# EAGLE board LoveMeter (EAGLE 7.5.0)
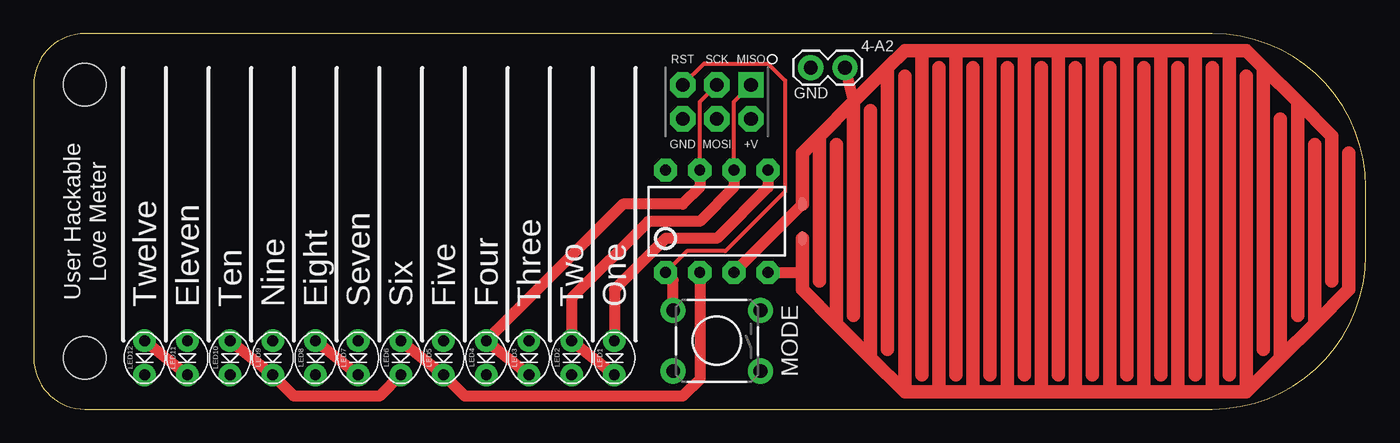
[diagram p0: board, top side]
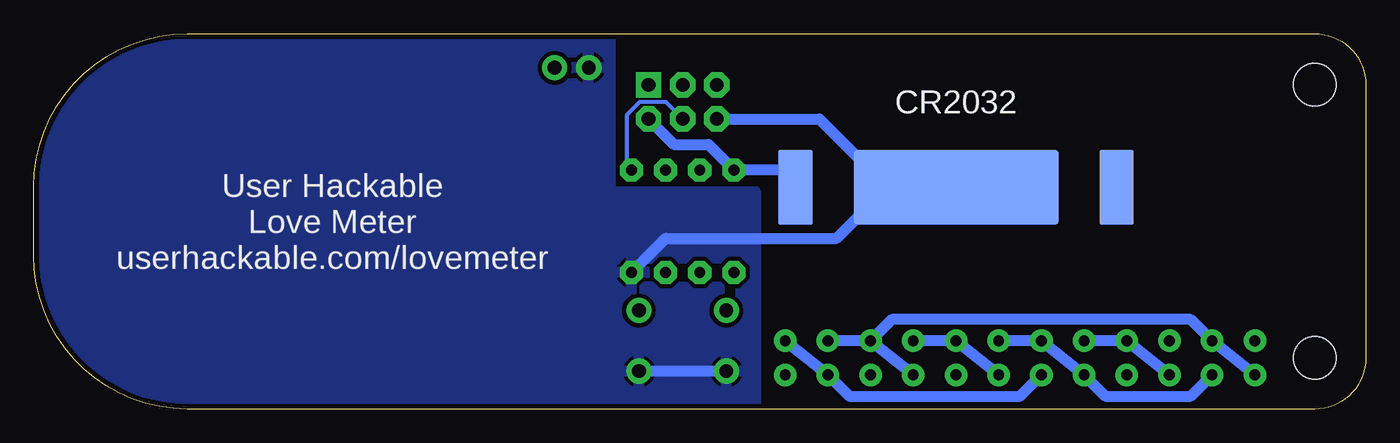
[diagram p1: board, bottom side, seen from below]

Size 99.06 x 27.94 mm. Coordinates in mm from the lower left corner, seen from the top.
Outline: 0,24.13 0,3.81 arc90 3.81,0 87.63,0 arc90 99.06,11.43 99.06,16.51 arc90 87.63,27.94 3.81,27.94 arc90 0,24.13
Copper layers (1*16): Top 0.0356mm / dielectric 1.5011mm / Bottom 0.0356mm
Design rules "LaenPCBOrder": minimum track width 6mil, minimum drill 13mil, track to track 6mil, track to pad 6mil, pad to pad 6mil, via to via 6mil, smd to smd 6mil, copper to edge 15mil, drill to drill 6mil, minimum pad ring 7mil, minimum via ring 7mil, stop-mask expansion 3mil, vias tented up to drill 0mil, thermal gap 10mil
Holes 3.17 mm at 3.81,3.81 3.81,24.13

## Footprints (pad centres in the part's own frame; a part is rotated, then mirrored left to right if it is on the bottom)
1X02 = drill 1.016 pad 1.88: 1 0,0; 2 2.54,0
2X3-NS = drill 1.016 pad 1.88 square: 1 -2.54,-1.27 | drill 1.016 pad 1.88 octagon: 2 -2.54,1.27; 3 0,-1.27; 4 0,1.27; 5 2.54,-1.27; 6 2.54,1.27
LED-OVAL = drill 0.8 pad 1.676: ANODE 1.27,0; CATHODE -1.27,0
TACTILE-PTH = drill 1.016 pad 1.88: 1 -3.251,2.261; 2 3.251,2.261; 3 -3.251,-2.261; 4 3.251,-2.261
DIP08 = drill 0.813 pad 1.727 octagon: 1 -3.81,-3.81; 2 -1.27,-3.81; 3 1.27,-3.81; 4 3.81,-3.81; 5 3.81,3.81; 6 1.27,3.81; 7 -1.27,3.81; 8 -3.81,3.81
THUMB_PAD = smd 1.016 x 0.508: 1 -1.27,20.32; 2 1.27,20.32
CR2032_STRAP = smd 2.54 x 5.588: + 11.938,0; +2 -11.938,0 | smd 15.24 x 5.588: - 0,0

## Placement (x,y rotation side)
4-A2  [1X02]  57.78,25.4 0 top
J1  AVR_SPI  [2X3-NS]  50.8,22.86 180 top
LED1  [LED-OVAL]  43.18,3.81 90 top
LED2  [LED-OVAL]  40.01,3.81 90 top
LED3  [LED-OVAL]  36.83,3.81 90 top
LED4  [LED-OVAL]  33.66,3.81 90 top
LED5  [LED-OVAL]  30.48,3.81 90 top
LED6  [LED-OVAL]  27.3,3.81 90 top
LED7  [LED-OVAL]  24.13,3.81 90 top
LED8  [LED-OVAL]  20.95,3.81 90 top
LED9  [LED-OVAL]  17.78,3.81 90 top
LED10  [LED-OVAL]  14.61,3.81 90 top
LED11  [LED-OVAL]  11.43,3.81 90 top
LED12  [LED-OVAL]  8.26,3.81 90 top
MODE  [TACTILE-PTH]  50.8,5.08 180 top
U1  TINY85  [DIP08]  50.8,13.97 0 top
U$3  THUMB_PAD  [THUMB_PAD]  77.47,13.97 90 top
U$4  [CR2032_STRAP]  30.48,16.51 0 bottom

## Library data of the parts
4-A2 = SparkFun-Connectors
J1 LED1-LED12 MODE = barbary_enterprises
U1 = SparkFun-DigitalIC; PROD_ID: IC-09445
U$3 = ThumbPad
U$4 = battery

## Nets
B0: J1.4 LED1.ANODE LED2.CATHODE LED7.CATHODE LED8.ANODE LED9.ANODE LED10.CATHODE U1.5
B1: J1.1 LED1.CATHODE LED2.ANODE LED3.ANODE LED4.CATHODE LED11.ANODE LED12.CATHODE U1.6
B2: J1.3 LED3.CATHODE LED4.ANODE LED5.ANODE LED6.CATHODE LED9.CATHODE LED10.ANODE U1.7
B3: LED5.CATHODE LED6.ANODE LED7.ANODE LED8.CATHODE LED11.CATHODE LED12.ANODE U1.2
B4: 4-A2.2 U1.3 U$3.2
GND: 4-A2.1 J1.6 MODE.1 MODE.2 U1.4 U$3.1 U$4.-
RST: J1.5 MODE.4 U1.1
VCC: J1.2 U1.8 U$4.+2

## Tracks (layer width: path | path; a pad name or v marks a point on that pad's centre or on a via)
B0
  Top 0.813: LED8.ANODE LED7.CATHODE | U1.5 54.61,16.51 50.8,12.7 46.99,12.7 43.18,8.89 LED1.ANODE
  Bottom 0.305: U1.5 54.93,18.1 54.93,21.91 53.98,22.86 52.07,22.86 J1.4
  Bottom 0.813: LED10.CATHODE LED9.ANODE LED8.ANODE | LED1.ANODE LED2.CATHODE 38.42,0.95 25.72,0.95 LED7.CATHODE
B1
  Top 0.305: U1.6 52.07,22.86 J1.1
  Top 0.813: LED1.CATHODE LED2.ANODE 40.01,8.26 45.72,13.97 49.53,13.97 52.07,16.51 U1.6
  Bottom 0.813: LED12.CATHODE LED11.ANODE 13.02,6.67 35.24,6.67 LED3.ANODE | LED4.CATHODE LED3.ANODE | LED3.ANODE LED2.ANODE
B2
  Top 0.305: U1.7 49.53,22.86 J1.3
  Top 0.813: LED10.ANODE LED9.CATHODE 19.37,0.95 25.72,0.95 LED6.CATHODE | LED3.CATHODE LED4.ANODE 43.81,15.24 48.26,15.24 49.53,16.51 U1.7
  Bottom 0.813: LED6.CATHODE LED5.ANODE LED4.ANODE
B3
  Top 0.813: LED12.ANODE LED11.CATHODE | LED6.ANODE LED5.CATHODE 32.07,0.95 48.26,0.95 49.53,2.22 U1.2
  Bottom 0.813: LED6.ANODE LED7.ANODE LED8.CATHODE 19.37,0.95 13.02,0.95 LED11.CATHODE
B4
  Top 0.813: U1.3 U$3.2 | 4-A2.2 60.96,22.86
GND
  Top 0.813: U$3.1 57.15,10.16 U1.4
  Bottom 0.813: MODE.2 MODE.1 | J1.6 40.64,21.59 35.56,16.51 | 35.56,16.51 U$4.- | U1.4 52.07,12.7 39.37,12.7 35.56,16.51
  pour Bottom (isolate 0.305): 45.4,0 99.06,0 99.06,27.94 56.2,27.94 56.2,16.19 45.4,16.19
RST
  Top 0.305: J1.5 49.85,25.72 54.61,25.72 55.88,24.45 55.88,16.19 51.44,11.75 48.58,11.75 U1.1
  Top 0.813: MODE.4 47.55,9.6 U1.1
VCC
  Bottom 0.813: U$4.+2 43.5,17.78 U1.8 48.9,19.68 51.44,19.68 J1.2

## Text on the board
tPlace: GND | User Hackable / Love Meter | Twelve | Eleven | Ten | Nine | Eight | Seven | Six | Five | Four | Three | Two | One
bPlace: CR2032 | User Hackable / Love Meter / userhackable.com/lovemeter